# EAGLE board X04A-015-B-XB (EAGLE 9.6.2)
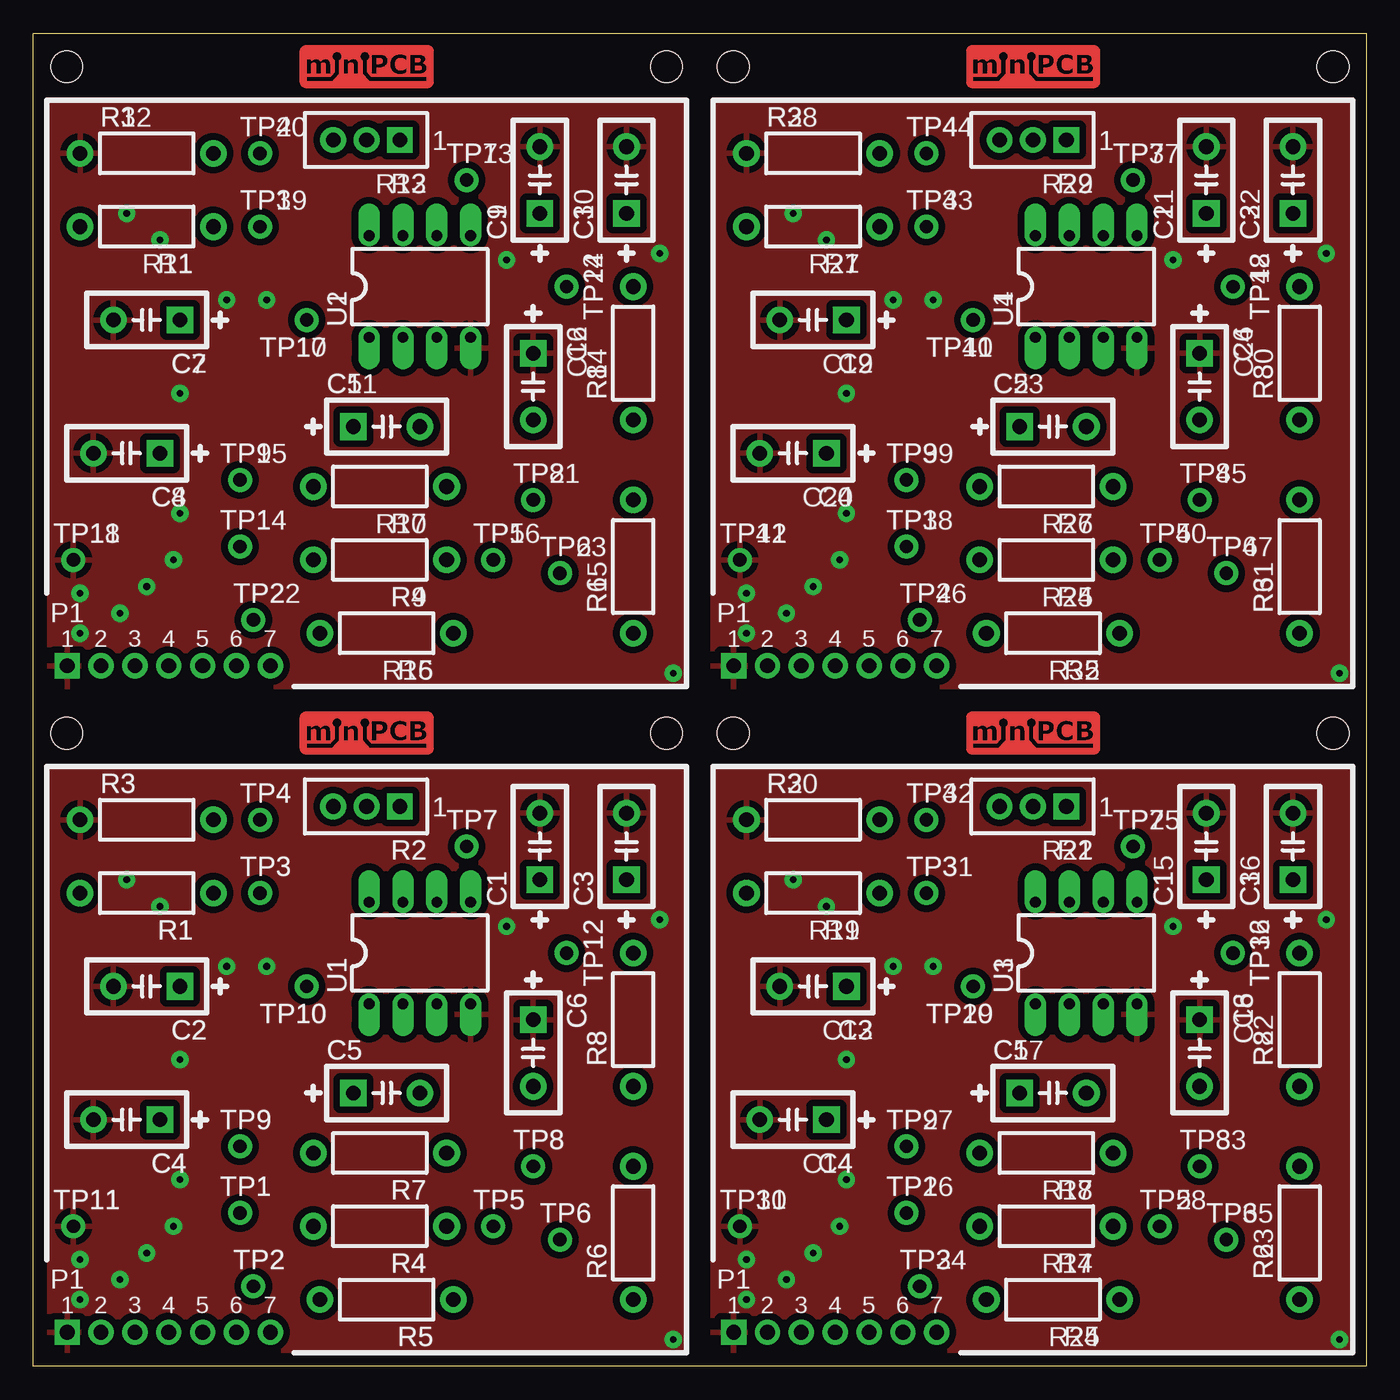
[diagram p0: board, top side]
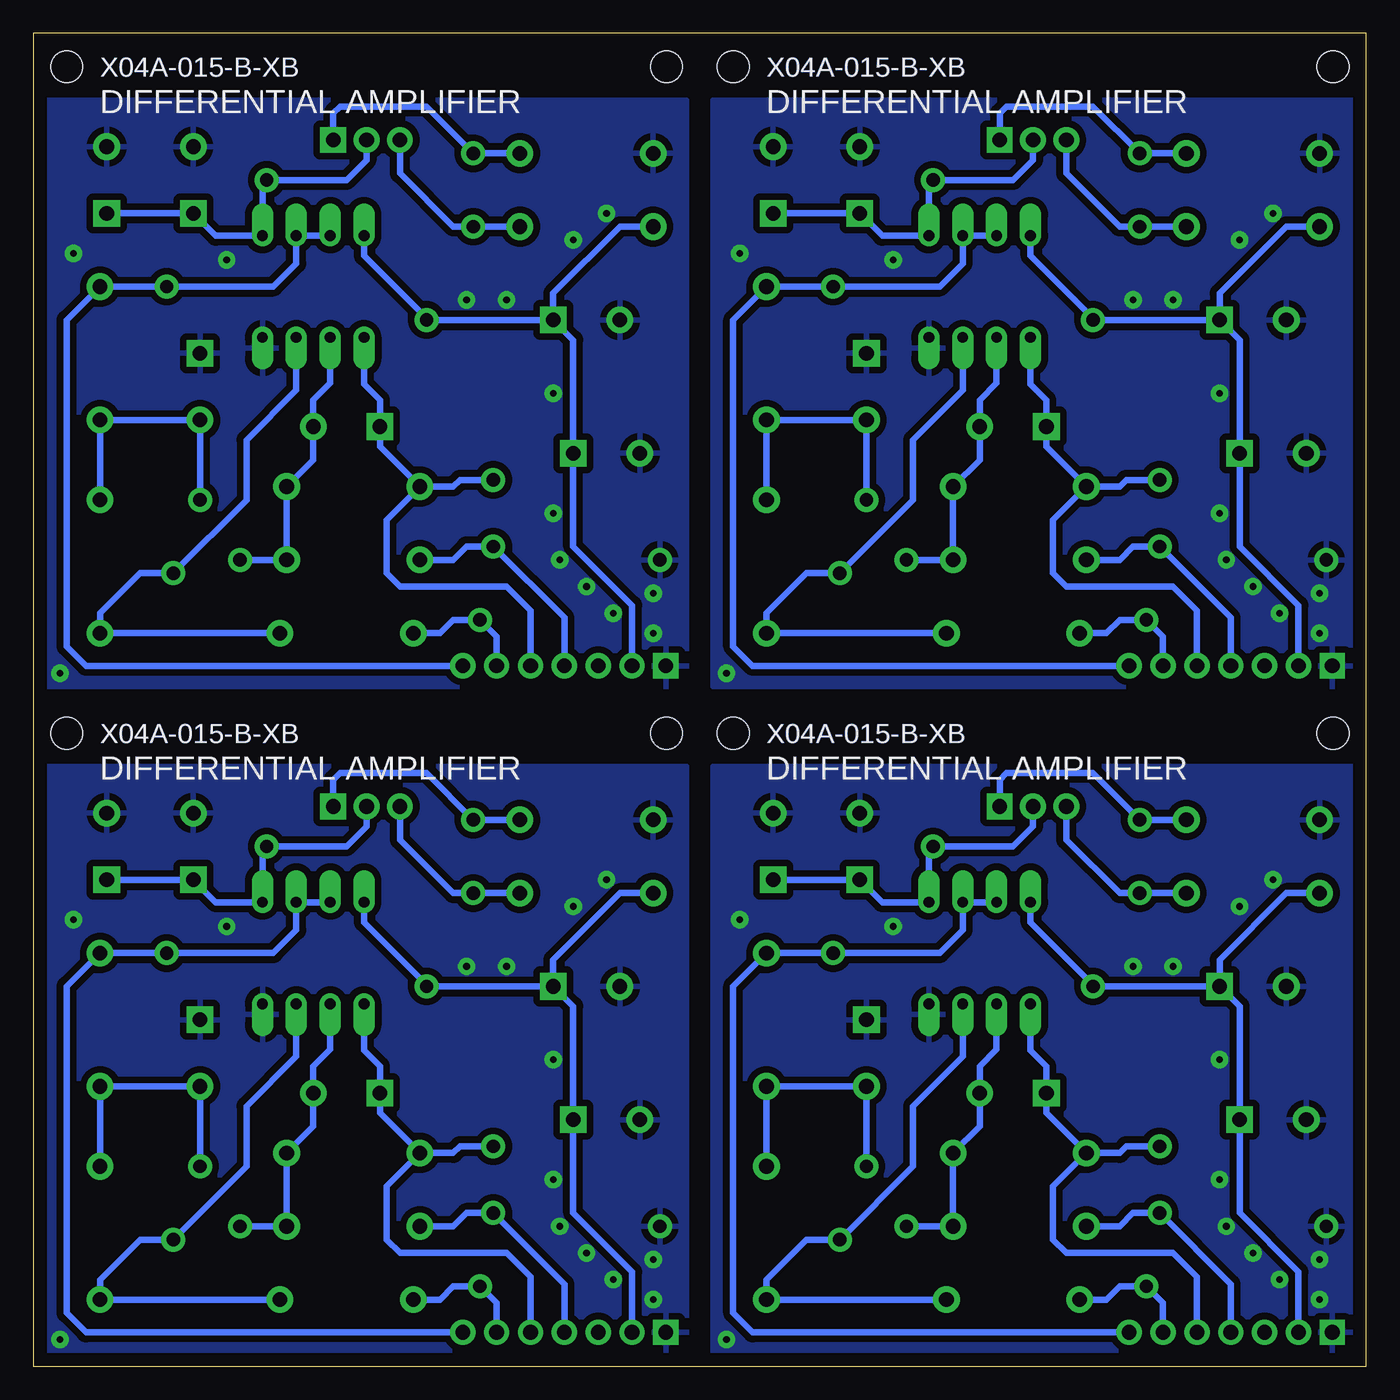
[diagram p1: board, bottom side, seen from below]

Size 100 x 100 mm. Coordinates in mm from the lower left corner, seen from the top.
Outline: 0,0 0,100 100,100 100,0 0,0
Copper layers (1*16): Top 0.035mm / dielectric 1.5mm / Bottom 0.035mm
Design rules "minipcb-THD": minimum track width 0.5mm, minimum drill 0.5mm, track to track 0.5mm, track to pad 0.5mm, pad to pad 0.5mm, via to via 0.5mm, smd to smd 0mil, copper to edge 1mm, drill to drill 1mm, minimum pad ring 0.4mm, minimum via ring 0.4mm, stop-mask expansion 0.1mm, vias tented up to drill 0.6mm, thermal gap 0.5mm

## Footprints (pad centres in the part's own frame; a part is rotated, then mirrored left to right if it is on the bottom)
C050-024X044 = drill 1.1 pad 2 square: 1 -2.5,0 | drill 1.1 pad 2: 2 2.5,0
MINIPCB_7P_50X50 = drill 1.1 square: 1 2.54,2.54 | drill 1.1: 2 5.08,2.54; 3 7.62,2.54; 4 10.16,2.54; 5 12.7,2.54; 6 15.24,2.54; 7 17.78,2.54 | hole 2.4: 47.5,47.5; 2.5,47.5
0207/10 = drill 1.1 pad 2: 1 -5,0; 2 5,0
TRIM_0100 = drill 1.1 pad 1.93 square: 1 0,0 | drill 1.1 pad 1.93: 2 2.5,0; 3 5,0
PINS_1_TESTPOINT_KE5000_NOTEXT = drill 1: 1 0,0
DIL08 = drill 0.813 offset: 1 -3.81,-3.81; 2 -1.27,-3.81; 3 1.27,-3.81; 4 3.81,-3.81; 5 3.81,3.81; 6 1.27,3.81; 7 -1.27,3.81; 8 -3.81,3.81

## Placement (x,y rotation side)
C1  [C050-024X044]  38,39 90 top
C2  [C050-024X044]  8.5,28.5 180 top
C3  [C050-024X044]  44.5,39 90 top
C4  [C050-024X044]  7,18.5 180 top
C5  [C050-024X044]  26.5,20.5 0 top
C6  [C050-024X044]  37.5,23.5 270 top
C7  [C050-024X044]  8.5,78.5 180 top
C8  [C050-024X044]  7,68.5 180 top
C9  [C050-024X044]  38,89 90 top
C10  [C050-024X044]  44.5,89 90 top
C11  [C050-024X044]  26.5,70.5 0 top
C12  [C050-024X044]  37.5,73.5 270 top
C13  [C050-024X044]  58.5,28.5 180 top
C14  [C050-024X044]  57,18.5 180 top
C15  [C050-024X044]  88,39 90 top
C16  [C050-024X044]  94.5,39 90 top
C17  [C050-024X044]  76.5,20.5 0 top
C18  [C050-024X044]  87.5,23.5 270 top
C19  [C050-024X044]  58.5,78.5 180 top
C20  [C050-024X044]  57,68.5 180 top
C21  [C050-024X044]  88,89 90 top
C22  [C050-024X044]  94.5,89 90 top
C23  [C050-024X044]  76.5,70.5 0 top
C24  [C050-024X044]  87.5,73.5 270 top
E$1  [MINIPCB_PANEL_IMAGEFRAME]  -25,-30 0 top  (outside the outline)
P1-  [MINIPCB_7P_50X50]  0,0 0 top
P1-1  [MINIPCB_7P_50X50]  0,50 0 top
P1-2  [MINIPCB_7P_50X50]  50,0 0 top
P1-3  [MINIPCB_7P_50X50]  50,50 0 top
R1  [0207/10]  8.5,35.5 180 top
R2  [TRIM_0100]  27.5,42 180 top
R3  [0207/10]  8.5,41 0 top
R4  [0207/10]  26,10.5 180 top
R5  [0207/10]  26.5,5 180 top
R6  [0207/10]  45,10 90 top
R7  [0207/10]  26,16 180 top
R8  [0207/10]  45,26 90 top
R9  [0207/10]  26,60.5 180 top
R10  [0207/10]  26,66 180 top
R11  [0207/10]  8.5,85.5 180 top
R12  [0207/10]  8.5,91 0 top
R13  [TRIM_0100]  27.5,92 180 top
R14  [0207/10]  45,76 90 top
R15  [0207/10]  45,60 90 top
R16  [0207/10]  26.5,55 180 top
R17  [0207/10]  76,10.5 180 top
R18  [0207/10]  76,16 180 top
R19  [0207/10]  58.5,35.5 180 top
R20  [0207/10]  58.5,41 0 top
R21  [TRIM_0100]  77.5,42 180 top
R22  [0207/10]  95,26 90 top
R23  [0207/10]  95,10 90 top
R24  [0207/10]  76.5,5 180 top
R25  [0207/10]  76,60.5 180 top
R26  [0207/10]  76,66 180 top
R27  [0207/10]  58.5,85.5 180 top
R28  [0207/10]  58.5,91 0 top
R29  [TRIM_0100]  77.5,92 180 top
R30  [0207/10]  95,76 90 top
R31  [0207/10]  95,60 90 top
R32  [0207/10]  76.5,55 180 top
TP1  [PINS_1_TESTPOINT_KE5000_NOTEXT]  15.5,11.5 0 top
TP2  [PINS_1_TESTPOINT_KE5000_NOTEXT]  16.5,6 0 top
TP3  [PINS_1_TESTPOINT_KE5000_NOTEXT]  17,35.5 0 top
TP4  [PINS_1_TESTPOINT_KE5000_NOTEXT]  17,41 0 top
TP5  [PINS_1_TESTPOINT_KE5000_NOTEXT]  34.5,10.5 0 top
TP6  [PINS_1_TESTPOINT_KE5000_NOTEXT]  39.5,9.5 0 top
TP7  [PINS_1_TESTPOINT_KE5000_NOTEXT]  32.5,39 0 top
TP8  [PINS_1_TESTPOINT_KE5000_NOTEXT]  37.5,15 0 top
TP9  [PINS_1_TESTPOINT_KE5000_NOTEXT]  15.5,16.5 0 top
TP10  [PINS_1_TESTPOINT_KE5000_NOTEXT]  20.5,28.5 180 top
TP11  [PINS_1_TESTPOINT_KE5000_NOTEXT]  3,10.5 0 top
TP12  [PINS_1_TESTPOINT_KE5000_NOTEXT]  40,31 0 top
TP13  [PINS_1_TESTPOINT_KE5000_NOTEXT]  32.5,89 0 top
TP14  [PINS_1_TESTPOINT_KE5000_NOTEXT]  15.5,61.5 0 top
TP15  [PINS_1_TESTPOINT_KE5000_NOTEXT]  15.5,66.5 0 top
TP16  [PINS_1_TESTPOINT_KE5000_NOTEXT]  34.5,60.5 0 top
TP17  [PINS_1_TESTPOINT_KE5000_NOTEXT]  20.5,78.5 180 top
TP18  [PINS_1_TESTPOINT_KE5000_NOTEXT]  3,60.5 0 top
TP19  [PINS_1_TESTPOINT_KE5000_NOTEXT]  17,85.5 0 top
TP20  [PINS_1_TESTPOINT_KE5000_NOTEXT]  17,91 0 top
TP21  [PINS_1_TESTPOINT_KE5000_NOTEXT]  37.5,65 0 top
TP22  [PINS_1_TESTPOINT_KE5000_NOTEXT]  16.5,56 0 top
TP23  [PINS_1_TESTPOINT_KE5000_NOTEXT]  39.5,59.5 0 top
TP24  [PINS_1_TESTPOINT_KE5000_NOTEXT]  40,81 0 top
TP25  [PINS_1_TESTPOINT_KE5000_NOTEXT]  82.5,39 0 top
TP26  [PINS_1_TESTPOINT_KE5000_NOTEXT]  65.5,11.5 0 top
TP27  [PINS_1_TESTPOINT_KE5000_NOTEXT]  65.5,16.5 0 top
TP28  [PINS_1_TESTPOINT_KE5000_NOTEXT]  84.5,10.5 0 top
TP29  [PINS_1_TESTPOINT_KE5000_NOTEXT]  70.5,28.5 180 top
TP30  [PINS_1_TESTPOINT_KE5000_NOTEXT]  53,10.5 0 top
TP31  [PINS_1_TESTPOINT_KE5000_NOTEXT]  67,35.5 0 top
TP32  [PINS_1_TESTPOINT_KE5000_NOTEXT]  67,41 0 top
TP33  [PINS_1_TESTPOINT_KE5000_NOTEXT]  87.5,15 0 top
TP34  [PINS_1_TESTPOINT_KE5000_NOTEXT]  66.5,6 0 top
TP35  [PINS_1_TESTPOINT_KE5000_NOTEXT]  89.5,9.5 0 top
TP36  [PINS_1_TESTPOINT_KE5000_NOTEXT]  90,31 0 top
TP37  [PINS_1_TESTPOINT_KE5000_NOTEXT]  82.5,89 0 top
TP38  [PINS_1_TESTPOINT_KE5000_NOTEXT]  65.5,61.5 0 top
TP39  [PINS_1_TESTPOINT_KE5000_NOTEXT]  65.5,66.5 0 top
TP40  [PINS_1_TESTPOINT_KE5000_NOTEXT]  84.5,60.5 0 top
TP41  [PINS_1_TESTPOINT_KE5000_NOTEXT]  70.5,78.5 180 top
TP42  [PINS_1_TESTPOINT_KE5000_NOTEXT]  53,60.5 0 top
TP43  [PINS_1_TESTPOINT_KE5000_NOTEXT]  67,85.5 0 top
TP44  [PINS_1_TESTPOINT_KE5000_NOTEXT]  67,91 0 top
TP45  [PINS_1_TESTPOINT_KE5000_NOTEXT]  87.5,65 0 top
TP46  [PINS_1_TESTPOINT_KE5000_NOTEXT]  66.5,56 0 top
TP47  [PINS_1_TESTPOINT_KE5000_NOTEXT]  89.5,59.5 0 top
TP48  [PINS_1_TESTPOINT_KE5000_NOTEXT]  90,81 0 top
U1  [DIL08]  29,31 0 top
U2  [DIL08]  29,81 0 top
U3  [DIL08]  79,31 0 top
U4  [DIL08]  79,81 0 top

## Library data of the parts
C1-C24 E$1 R1-R32 TP1-TP48 U1-U4 = minipcb
P1- P1-1-P1-3 = minipcb; PART_NUMBER: X04A-015-B-XB; REVISION: B

## Nets
GND: C1.2 C2.2 C3.2 C4.2 C6.1 P1-.1 R3.1 TP11.1 U1.4
GND1: C7.2 C8.2 C9.2 C10.2 C12.1 P1-1.1 R12.1 TP18.1 U2.4
GND2: C13.2 C14.2 C15.2 C16.2 C18.1 P1-2.1 R20.1 TP30.1 U3.4
GND3: C19.2 C20.2 C21.2 C22.2 C24.1 P1-3.1 R28.1 TP42.1 U4.4
IN: P1-.4 R4.2 TP1.1
IN1: P1-1.4 R9.2 TP14.1
IN2: P1-2.4 R17.2 TP26.1
IN3: P1-3.4 R25.2 TP38.1
N$1: C1.1 C3.1 R2.2 TP7.1 U1.5
N$2: C6.2 R6.2 R8.1 TP8.1
N$3: R5.1 R6.1 TP6.1 U1.3
N$4: P1-.6 R5.2 TP2.1
N$5: C9.1 C10.1 R13.2 TP13.1 U2.5
N$6: C12.2 R14.1 R15.2 TP21.1
N$7: R15.1 R16.1 TP23.1 U2.3
N$8: P1-1.6 R16.2 TP22.1
N$9: C15.1 C16.1 R21.2 TP25.1 U3.5
N$10: C18.2 R22.1 R23.2 TP33.1
N$11: R23.1 R24.1 TP35.1 U3.3
N$12: P1-2.6 R24.2 TP34.1
N$13: C21.1 C22.1 R29.2 TP37.1 U4.5
N$14: C24.2 R30.1 R31.2 TP45.1
N$15: R31.1 R32.1 TP47.1 U4.3
N$16: P1-3.6 R32.2 TP46.1
NC: P1-.3
NC1: P1-1.3
NC2: P1-2.3
NC3: P1-3.3
OUT: C5.1 P1-.5 R7.2 TP9.1 U1.1
OUT1: C11.1 P1-1.5 R10.2 TP15.1 U2.1
OUT2: C17.1 P1-2.5 R18.2 TP27.1 U3.1
OUT3: C23.1 P1-3.5 R26.2 TP39.1 U4.1
P1.1: R2.1 R3.2 TP4.1
P1.2: R11.1 R13.3 TP19.1
P1.3: R1.1 R2.3 TP3.1
P1.4: R12.2 R13.1 TP20.1
P1.5: R19.1 R21.3 TP31.1
P1.6: R20.2 R21.1 TP32.1
P1.7: R27.1 R29.3 TP43.1
P1.8: R28.2 R29.1 TP44.1
V+: C2.1 C4.1 P1-.2 R1.2 TP10.1 U1.8
V+1: C7.1 C8.1 P1-1.2 R11.2 TP17.1 U2.8
V+2: C13.1 C14.1 P1-2.2 R19.2 TP29.1 U3.8
V+3: C19.1 C20.1 P1-3.2 R27.2 TP41.1 U4.8
VFB: C5.2 R4.1 R7.1 TP5.1 U1.2
VFB1: C11.2 R9.1 R10.1 TP16.1 U2.2
VFB2: C17.2 R17.1 R18.1 TP28.1 U3.2
VFB3: C23.2 R25.1 R26.1 TP40.1 U4.2
VREF: P1-.7 R8.2 TP12.1 U1.6 U1.7
VREF1: P1-1.7 R14.2 TP24.1 U2.6 U2.7
VREF2: P1-2.7 R22.2 TP36.1 U3.6 U3.7
VREF3: P1-3.7 R30.2 TP48.1 U4.6 U4.7

## Tracks (layer width: path | path; a pad name or v marks a point on that pad's centre or on a via)
GND  (via drill 0.5)
  other vias: 3.5,5 3.5,8 6.5,6.5 8.5,8.5 10.5,10.5 11,14 48,2 47,33.5 35.5,33 11,23 7,36.5 9.5,34.5 14.5,30 17.5,30
  pour Top: 1,1 49,1 49,45 1,45
  pour Bottom: 1,1 49,1 49,45 1,45
GND1  (via drill 0.5)
  other vias: 3.5,55 3.5,58 6.5,56.5 8.5,58.5 10.5,60.5 11,64 48,52 47,83.5 35.5,83 11,73 7,86.5 9.5,84.5 14.5,80 17.5,80
  pour Top: 1,51 49,51 49,95 1,95
  pour Bottom: 1,51 49,51 49,95 1,95
GND2  (via drill 0.5)
  other vias: 53.5,5 53.5,8 56.5,6.5 58.5,8.5 60.5,10.5 61,14 98,2 97,33.5 85.5,33 61,23 57,36.5 59.5,34.5 64.5,30 67.5,30
  pour Top: 51,1 99,1 99,45 51,45
  pour Bottom: 51,1 99,1 99,45 51,45
GND3  (via drill 0.5)
  other vias: 53.5,55 53.5,58 56.5,56.5 58.5,58.5 60.5,60.5 61,64 98,52 97,83.5 85.5,83 61,73 57,86.5 59.5,84.5 64.5,80 67.5,80
  pour Top: 51,51 99,51 99,95 51,95
  pour Bottom: 51,51 99,51 99,95 51,95
IN
  Bottom 0.5: P1-.4 10.16,6.16 TP1.1 17.5,11.5 18.5,10.5 R4.2
IN1
  Bottom 0.5: P1-1.4 10.16,56.16 TP14.1 17.5,61.5 18.5,60.5 R9.2
IN2
  Bottom 0.5: P1-2.4 60.16,6.16 TP26.1 67.5,11.5 68.5,10.5 R17.2
IN3
  Bottom 0.5: P1-3.4 60.16,56.16 TP38.1 67.5,61.5 68.5,60.5 R25.2
N$1
  Bottom 0.5: R2.2 25,40.5 26.5,39 TP7.1 32.81,38.69 U1.5 36.31,34.81 C1.1 C3.1
N$2
  Bottom 0.5: R6.2 R8.1 C6.2 TP8.1
N$3
  Bottom 0.5: U1.3 30.27,23.23 34,19.5 34,15 TP6.1 42,9.5 45,6.5 R6.1 R5.1
N$4
  Bottom 0.5: P1-.6 15.24,4.74 TP2.1 18.5,6 19.5,5 R5.2
N$5
  Bottom 0.5: R13.2 25,90.5 26.5,89 TP13.1 32.81,88.69 U2.5 36.31,84.81 C9.1 C10.1
N$6
  Bottom 0.5: R15.2 R14.1 C12.2 TP21.1
N$7
  Bottom 0.5: U2.3 30.27,73.23 34,69.5 34,65 TP23.1 42,59.5 45,56.5 R15.1 R16.1
N$8
  Bottom 0.5: P1-1.6 15.24,54.74 TP22.1 18.5,56 19.5,55 R16.2
N$9
  Bottom 0.5: R21.2 75,40.5 76.5,39 TP25.1 82.81,38.69 U3.5 86.31,34.81 C15.1 C16.1
N$10
  Bottom 0.5: R23.2 R22.1 C18.2 TP33.1
N$11
  Bottom 0.5: U3.3 80.27,23.23 84,19.5 84,15 TP35.1 92,9.5 95,6.5 R23.1 R24.1
N$12
  Bottom 0.5: P1-2.6 65.24,4.74 TP34.1 68.5,6 69.5,5 R24.2
N$13
  Bottom 0.5: R29.2 75,90.5 76.5,89 TP37.1 82.81,88.69 U4.5 86.31,84.81 C21.1 C22.1
N$14
  Bottom 0.5: R31.2 R30.1 C24.2 TP45.1
N$15
  Bottom 0.5: U4.3 80.27,73.23 84,69.5 84,65 TP47.1 92,59.5 95,56.5 R31.1 R32.1
N$16
  Bottom 0.5: P1-3.6 65.24,54.74 TP46.1 68.5,56 69.5,55 R32.2
OUT
  Bottom 0.5: P1-.5 12.7,6.7 14.5,8.5 22.5,8.5 23.5,9.5 23.5,13.5 R7.2 | TP9.1 18,16.5 18.5,16 R7.2 | R7.2 24,19 C5.1 24,22.5 25.19,23.69 U1.1
OUT1
  Bottom 0.5: P1-1.5 12.7,56.7 14.5,58.5 22.5,58.5 23.5,59.5 23.5,63.5 R10.2 | TP15.1 18,66.5 18.5,66 R10.2 | R10.2 24,69 C11.1 24,72.5 25.19,73.69 U2.1
OUT2
  Bottom 0.5: P1-2.5 62.7,6.7 64.5,8.5 72.5,8.5 73.5,9.5 73.5,13.5 R18.2 | TP27.1 68,16.5 68.5,16 R18.2 | R18.2 74,19 C17.1 74,22.5 75.19,23.69 U3.1
OUT3
  Bottom 0.5: P1-3.5 62.7,56.7 64.5,58.5 72.5,58.5 73.5,59.5 73.5,63.5 R26.2 | TP39.1 68,66.5 68.5,66 R26.2 | R26.2 74,69 C23.1 74,72.5 75.19,73.69 U4.1
P1.1
  Bottom 0.5: R3.2 TP4.1 20.5,44.5 27,44.5 27.5,44 R2.1
P1.2
  Bottom 0.5: R11.1 TP19.1 18.5,85.5 22.5,89.5 R13.3
P1.3
  Bottom 0.5: R1.1 TP3.1 18.5,35.5 22.5,39.5 R2.3
P1.4
  Bottom 0.5: R12.2 TP20.1 20.5,94.5 27,94.5 27.5,94 R13.1
P1.5
  Bottom 0.5: R19.1 TP31.1 68.5,35.5 72.5,39.5 R21.3
P1.6
  Bottom 0.5: R20.2 TP32.1 70.5,44.5 77,44.5 77.5,44 R21.1
P1.7
  Bottom 0.5: R27.1 TP43.1 68.5,85.5 72.5,89.5 R29.3
P1.8
  Bottom 0.5: R28.2 TP44.1 70.5,94.5 77,94.5 77.5,94 R29.1
V+
  Bottom 0.5: P1-.2 5.08,7.08 9.5,11.5 C4.1 9.5,27 C2.1 | R1.2 6,35.5 11,30.5 C2.1 | C2.1 TP10.1 20.5,28.62 25.19,33.31 U1.8
V+1
  Bottom 0.5: P1-1.2 5.08,57.08 9.5,61.5 C8.1 9.5,77 C7.1 | R11.2 6,85.5 11,80.5 C7.1 | C7.1 TP17.1 20.5,78.62 25.19,83.31 U2.8
V+2
  Bottom 0.5: P1-2.2 55.08,7.08 59.5,11.5 C14.1 59.5,27 C13.1 | R19.2 56,35.5 61,30.5 C13.1 | C13.1 TP29.1 70.5,28.62 75.19,33.31 U3.8
V+3
  Bottom 0.5: P1-3.2 55.08,57.08 59.5,61.5 C20.1 59.5,77 C19.1 | R27.2 56,85.5 61,80.5 C19.1 | C19.1 TP41.1 70.5,78.62 75.19,83.31 U4.8
VFB
  Bottom 0.5: U1.2 27.73,23.77 29,22.5 C5.2 29,18 R7.1 R4.1 TP5.1
VFB1
  Bottom 0.5: U2.2 27.73,73.77 29,72.5 C11.2 29,68 R10.1 R9.1 TP16.1
VFB2
  Bottom 0.5: U3.2 77.73,23.77 79,22.5 C17.2 79,18 R18.1 R17.1 TP28.1
VFB3
  Bottom 0.5: U4.2 77.73,73.77 79,72.5 C23.2 79,68 R26.1 R25.1 TP40.1
VREF
  Bottom 0.5: U1.7 U1.6 30.27,32.73 32,31 TP12.1 R8.2 47.5,28.5 47.5,4 46.04,2.54 P1-.7
VREF1
  Bottom 0.5: U2.7 U2.6 30.27,82.73 32,81 TP24.1 R14.2 47.5,78.5 47.5,54 46.04,52.54 P1-1.7
VREF2
  Bottom 0.5: U3.7 U3.6 80.27,32.73 82,31 TP36.1 R22.2 97.5,28.5 97.5,4 96.04,2.54 P1-2.7
VREF3
  Bottom 0.5: U4.7 U4.6 80.27,82.73 82,81 TP48.1 R30.2 97.5,78.5 97.5,54 96.04,52.54 P1-3.7

## Text on the board
bPlace: DIFFERENTIAL AMPLIFIER | DIFFERENTIAL AMPLIFIER | DIFFERENTIAL AMPLIFIER | DIFFERENTIAL AMPLIFIER
_tNames: R3 | R3 | TP4 | TP4 | TP7 | TP7 | R2 | R2 | TP3 | TP3 | C1 | C3 | C1 | C3 | R1 | R1 | U1 | C6 | TP12 | U1 | C6 | TP12 | TP10 | TP10 | C2 | C2 | C5 | R8 | C5 | R8 | TP9 | TP9 | C4 | TP8 | C4 | TP8 | R7 | R7 | TP1 | TP1 | TP11 | TP5 | TP11 | TP5 | TP6 | TP6 | R4 | R4 | TP2 | R6 | TP2 | R6 | R5 | R5 | R3 | R3 | TP4 | TP4 | TP7 | TP7 | R2 | R2 | TP3 | TP3 | C1 | C3 | C1 | C3 | R1 | R1 | U1 | C6 | TP12 | U1 | C6 | TP12 | TP10 | TP10 | C2 | C2 | C5 | R8 | C5 | R8 | TP9 | TP9 | C4 | TP8 | C4 | TP8 | R7 | R7 | TP1 | TP1 | TP11 | TP5 | TP11 | TP5 | TP6 | TP6 | R4 | R4 | TP2 | R6 | TP2 | R6 | R5 | R5